# Altium PCB New_Bottom_Board.PcbDoc (part 2 of 2)
Units mm, origin at the board's own origin, x right, y up, seen from the top; angles counter-clockwise.
Board outline 85 x 66 mm, 2 copper layers (Top Layer, Bottom Layer); 47 components, 65 nets, 232 pads, 144 vias.
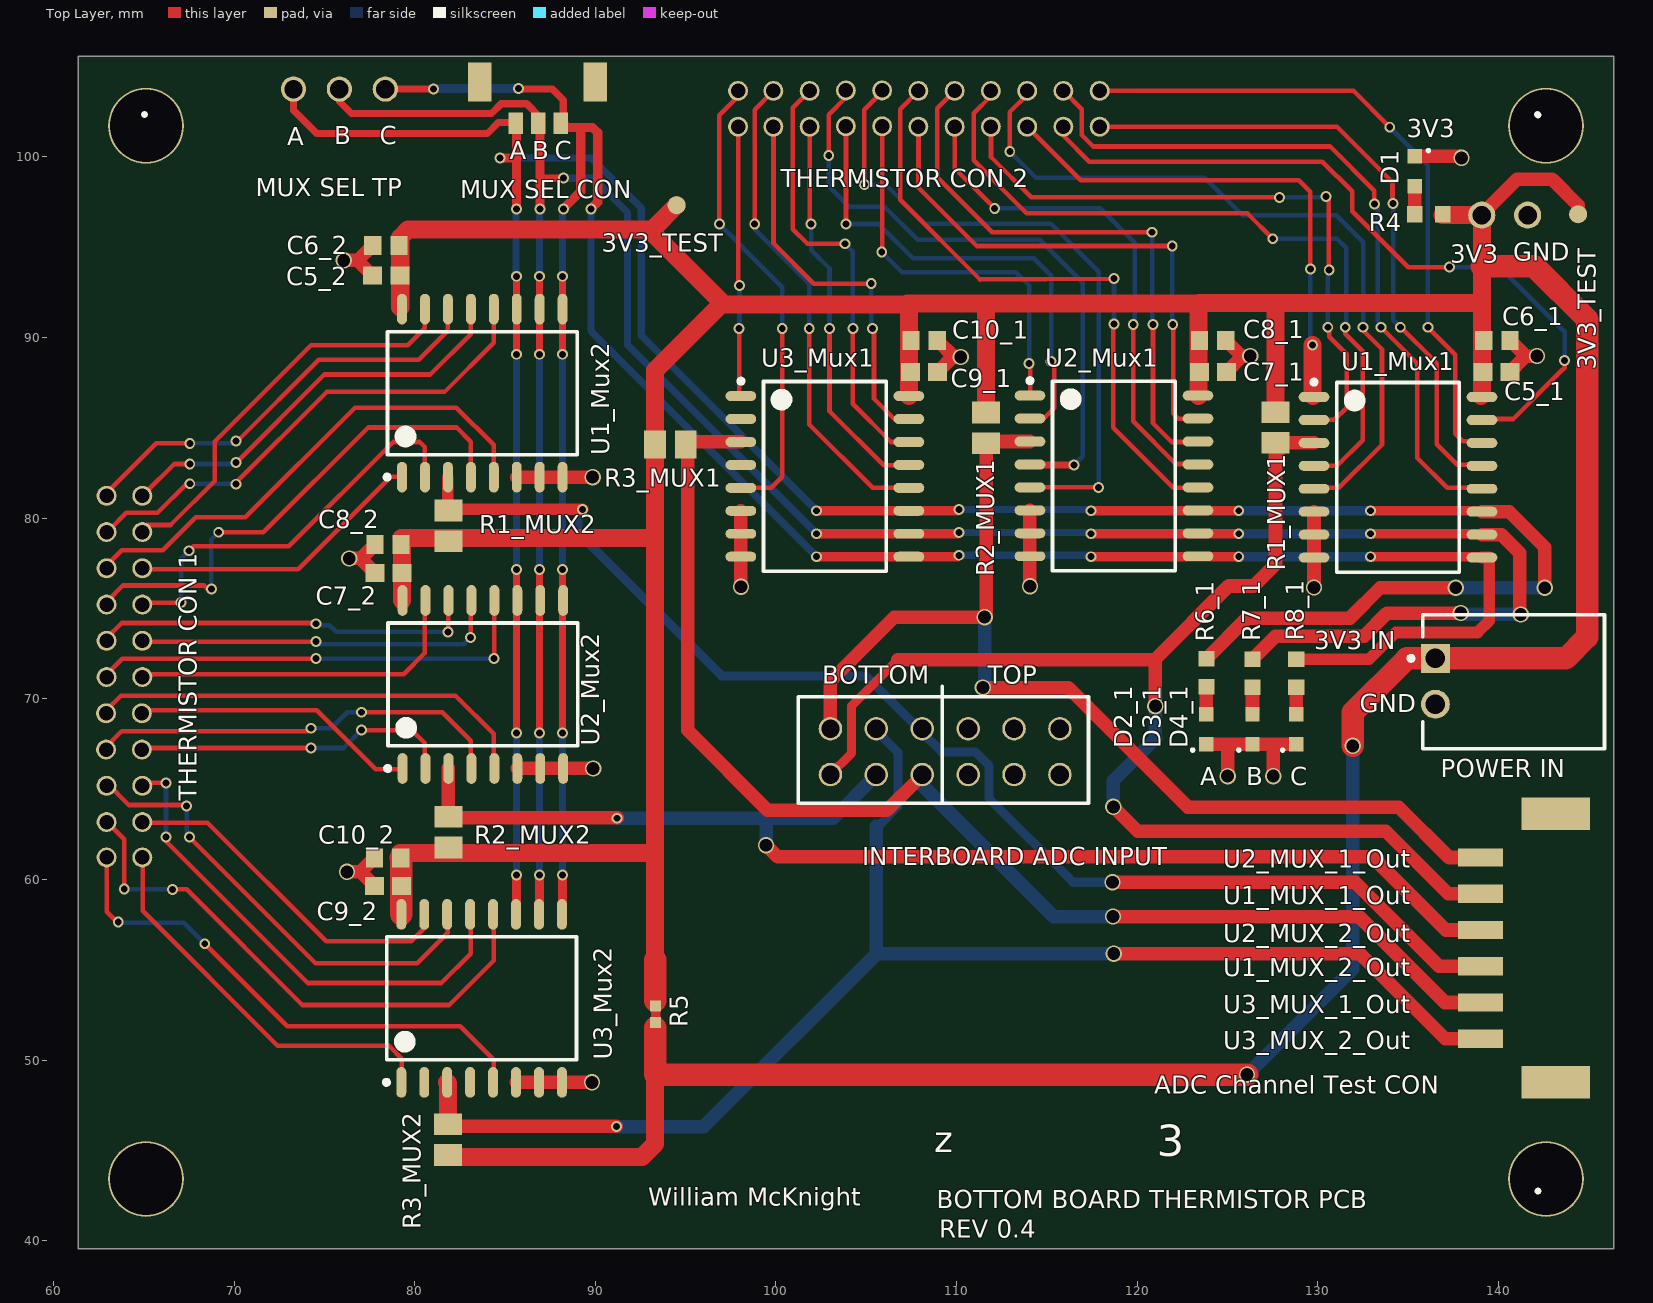
[diagram p0: Top Layer view]

## Via types
v1: diameter 0.6, hole 0.381, Top Layer to Bottom Layer, tented top, 115 vias
v2: diameter 0.9, hole 0.711, Top Layer to Bottom Layer, tented top, 29 vias

## Nets (pads, with @x,y where several pads share a name; then routed paths per layer and width w, separated by ;. In a path a pad name is that pad's centre, name@x,y a point inside that pad or via, vN(x,y) a via of type N, cw(c..) or ccw(c..) an arc to the next point about the centre after c; other vN are vias at no path point) (continued)
TS_IN9_2: (continued)
  Bottom Layer w0.254: v1(74.538,73.173) 74.686,73.025 82.721,73.025 v1(83.098,73.401)
TS_IN10_1: "THERMISTOR CON 2.10" U2_Mux1.14 | length 31.9
  Top Layer w0.254: 109.895,103.653 108.93,102.688 108.93,98.878 111.978,95.83 v1(120.817,95.83) ; v1(120.868,90.724) 120.868,85.263 121.909,84.222 U2_Mux1.14@123.384,84.222
  Bottom Layer w0.254: v1(120.817,95.83) 120.817,90.775 v1(120.868,90.724)
TS_IN10_2: "THERMISTOR CON 1.10" U2_Mux2.14 | length 21
  Top Layer w0.254: 62.956,73.376 63.78,74.2 v1@74.477,74.2 ; U2_Mux2.14@81.828,75.435 81.853,75.41 v1(81.853,73.706)
  Bottom Layer w0.254: v1@74.64,74.087 75.275,74.087 75.656,73.706 v1(81.853,73.706)
  other v1: 74.538,74.162
TS_IN11_1: "THERMISTOR CON 2.11" U2_Mux1.15 | length 29.6
  Top Layer w0.254: 107.888,101.672 107.888,98.293 111.114,95.068 v1(121.934,95.068) ; v1@121.96,90.699 121.985,90.673 121.985,85.797 122.265,85.517 U2_Mux1.15 U2_Mux1.15@123.384,85.492
  Bottom Layer w0.254: v1(121.934,95.068) 121.934,90.724 v1@121.96,90.699
  other v1: 121.96,90.724
TS_IN11_2: "THERMISTOR CON 1.11" U2_Mux2.15 | length 19
  Top Layer w0.254: 64.937,71.369 79.389,71.369 80.558,72.538 U2_Mux2.15@80.558,75.435
TS_IN12_1: "THERMISTOR CON 2.12" U2_Mux1.12 | length 34.5
  Top Layer w0.254: 107.888,103.653 106.875,102.64 106.875,97.63 111.292,93.213 v1(118.709,93.264) ; v1@118.658,90.75 118.658,85.009 121.985,81.682 U2_Mux1.12@123.384,81.682
  Bottom Layer w0.254: v1@118.709,90.724 v1(118.709,90.75) v1(118.709,93.264)
TS_IN12_2: "THERMISTOR CON 1.12" U2_Mux2.12 | length 25
  Top Layer w0.254: 62.956,71.369 63.819,72.233 v1(74.538,72.233) ; U2_Mux2.12@84.368,75.435 84.393,75.41 v1(84.393,72.233)
  Bottom Layer w0.254: v1(74.538,72.233) v1(84.393,72.233)
TS_IN13_1: "THERMISTOR CON 2.13" U2_Mux1.1 | length 22.1
  Top Layer w0.254: v1@105.882,94.737 105.882,101.697 ; U2_Mux1.1@114.084,86.762 v1@114.084,88.491
  Top Layer w0.4: v1(114.01,88.565) v1@114.084,88.491
  Bottom Layer w0.254: v1(105.856,94.737) 106.974,93.62 113.273,93.62 114.01,92.883 v1(114.01,88.565)
  Bottom Layer w0.508: v1(114.01,88.565) v1@114.06,88.514
TS_IN13_2: "THERMISTOR CON 1.13" U2_Mux2.1 | length 15.7
  Top Layer w0.254: 64.911,69.363 74.589,69.363 77.84,66.112 79.264,66.112 U2_Mux2.1@79.288,66.135
TS_IN14_1: "THERMISTOR CON 2.14" U2_Mux1.5 | length 36.3
  Top Layer w0.254: v1(104.891,98.471) 104.891,102.611 105.882,103.602 105.882,103.678 ; U2_Mux1.5 v1(117.845,81.707)
  Bottom Layer w0.254: v1(104.891,98.471) 106.059,98.471 108.218,96.312 115.203,96.312 117.87,93.645 v1@117.87,81.733
  Bottom Layer w0.508: v1(117.845,81.707) v1@117.87,81.733
TS_IN14_2: "THERMISTOR CON 1.14" U2_Mux2.5 | length 24.6
  Top Layer w0.254: 62.93,69.363 63.742,70.175 82.26,70.175 84.368,68.067 U2_Mux2.5@84.368,66.135
TS_IN15_1: "THERMISTOR CON 2.15" U2_Mux1.2 | length 26.9
  Top Layer w0.254: v1(103.875,96.287) 103.875,96.592 103.875,101.697 ; U2_Mux1.2@114.084,85.492 114.797,85.492 115.407,86.101 115.407,88.489 v1(115.229,88.667)
  Bottom Layer w0.254: v1(103.875,96.287) 105.678,96.287 105.882,96.084 107.583,94.382 114.264,94.382 115.229,93.417 v1(115.229,88.667)
TS_IN15_2: "THERMISTOR CON 1.15" U2_Mux2.2 | length 17.8
  Top Layer w0.254: 64.911,67.356 64.988,67.28 v1@74.132,67.28 ; v1(77.053,68.271) 79.847,68.271 80.558,67.559 U2_Mux2.2@80.558,66.135
  Bottom Layer w0.254: v1@74.132,67.28 v1(74.259,67.28) 76.062,67.28 v1(77.053,68.271)
TS_IN16_1: "THERMISTOR CON 2.16" U2_Mux1.4 | length 34.7
  Top Layer w0.254: v1@102.91,100.097 102.91,102.332 103.875,103.297 103.875,103.678
  Top Layer w0.4: U2_Mux1.4@114.084,82.952 v1(116.499,82.952)
  Bottom Layer w0.254: v1(102.922,100.084) 102.922,98.382 103.392,97.912 104.053,97.252 106.009,97.252 107.837,95.423 114.594,95.423 116.981,93.036 116.981,83.434 v1(116.499,82.952)
TS_IN16_2: "THERMISTOR CON 1.16" U2_Mux2.4 | length 23.2
  Top Layer w0.254: 62.93,67.356 63.774,68.2 74.086,68.2 v1(74.259,68.372) ; v1(77.053,69.261) 81.523,69.261 83.098,67.686 U2_Mux2.4@83.098,66.135
  Bottom Layer w0.254: v1(74.259,68.372) 75.376,68.372 76.265,69.261 v1(77.053,69.261)
TS_IN17_1: "THERMISTOR CON 2.17" U3_Mux1.13 | length 21.8
  Top Layer w0.254: 101.868,101.672 101.868,96.287 v1@101.945,96.211 ; v1@102.961,90.546 102.961,85.924 105.958,82.926 U3_Mux1.13@107.331,82.926
  Bottom Layer w0.254: v1@101.945,96.211 101.945,94.839 102.961,93.823 v1@102.961,90.546
  other v1: 102.961,90.496 101.945,96.287
TS_IN17_2: "THERMISTOR CON 1.17" U3_Mux2.13 | length 27.5
  Top Layer w0.254: 64.937,65.35 v1(66.232,65.35) ; v1@66.181,62.352 66.207,62.327 66.207,62.149 74.081,54.275 81.472,54.275 83.098,55.901 U3_Mux2.13@83.098,58.087
  Bottom Layer w0.254: v1(66.232,62.352) v1(66.232,65.35)
TS_IN18_1: "THERMISTOR CON 2.18" U3_Mux1.14 | length 24.3
  Top Layer w0.254: 101.868,103.653 100.929,102.713 100.929,96.007 101.741,95.195 v1(103.824,95.195) ; v1@104.256,90.546 104.256,86.33 106.364,84.222 U3_Mux1.14
  Bottom Layer w0.254: v1(103.824,95.195) 104.256,94.763 v1@104.256,90.546
  other v1: 104.256,90.496
TS_IN18_2: "THERMISTOR CON 1.18" U3_Mux2.14 | length 25.7
  Top Layer w0.254: 62.956,65.35 64.18,64.125 67.395,64.125 67.375,64.105 v1(67.375,64.075) ; v1(67.528,62.352) 74.513,55.367 80.142,55.367 81.828,57.053 U3_Mux2.14@81.828,58.087
  Bottom Layer w0.254: v1(67.375,64.075) 67.375,62.657 67.553,62.479 67.528,62.454 v1(67.528,62.352)
TS_IN19_1: "THERMISTOR CON 2.19" U3_Mux1.15 | length 21.6
  Top Layer w0.254: 99.862,101.675 99.862,95.212 102.089,92.985 v1(105.272,92.985) ; v1@105.348,90.47 105.424,90.394 105.424,86.609 106.542,85.492 U3_Mux1.15
  Bottom Layer w0.254: v1(105.272,92.985) 105.272,90.546 v1@105.348,90.47
  other v1: 105.348,90.496
TS_IN19_2: "THERMISTOR CON 1.19" U3_Mux2.15 | length 19.5
  Top Layer w0.254: 64.937,63.343 65.13,63.15 68.533,63.15 75.097,56.587 79.805,56.587 80.53,57.312 U3_Mux2.15
TS_IN20_1: "THERMISTOR CON 2.20" U3_Mux1.12 | length 27.1
  Top Layer w0.254: v1(98.82,96.287) 98.831,96.297 98.831,102.622 99.862,103.653 ; v1(101.843,90.496) 101.843,85.187 105.348,81.682 U3_Mux1.12
  Bottom Layer w0.254: v1(98.82,96.287) 98.82,96.007 101.843,92.985 v1(101.843,90.496)
TS_IN20_2: "THERMISTOR CON 1.20" U3_Mux2.12 | length 31
  Top Layer w0.254: 62.956,63.343 62.956,63.191 63.921,62.225 v1(63.921,59.482) ; v1(66.588,59.457) 67.375,59.457 73.776,53.056 81.904,53.056 84.368,55.52 U3_Mux2.12@84.368,58.087
  Bottom Layer w0.254: v1(63.921,59.482) 63.946,59.457 v1(66.588,59.457)
TS_IN21_1: "THERMISTOR CON 2.21" U3_Mux1.1 | length 14.7
  Top Layer w0.254: 97.906,101.672 97.906,92.959 v1(97.982,92.883) ; U3_Mux1.1@97.957,86.762 v1@97.957,90.242
  Bottom Layer w0.254: v1(97.957,90.496) 97.982,90.521 v1(97.982,92.883)
TS_IN21_2: "THERMISTOR CON 1.21" U3_Mux2.1 | length 22.2
  Top Layer w0.254: 64.937,61.387 64.937,58.263 72.404,50.795 78.577,50.795 79.288,50.084 U3_Mux2.1@79.288,48.787
TS_IN22_1: "THERMISTOR CON 2.22" U3_Mux1.5 | length 25.8
  Top Layer w0.254: v1(96.865,96.287) 96.865,102.307 97.906,103.348 97.906,103.653 ; U3_Mux1.5 99.735,81.682 100.344,82.291 v1(100.344,90.496)
  Bottom Layer w0.254: v1(96.865,96.287) 98.185,94.966 98.16,94.966 100.344,92.782 v1(100.344,90.496)
TS_IN22_2: "THERMISTOR CON 1.22" U3_Mux2.5 | length 29.1
  Top Layer w0.254: 62.956,61.387 62.956,58.212 63.514,57.653 v1(63.591,57.653) ; v1(68.378,56.447) 72.938,51.888 82.514,51.888 84.368,50.033 U3_Mux2.5@84.368,48.787
  Bottom Layer w0.254: v1@63.654,57.603 67.223,57.603 v1(68.378,56.447)
pads on no net: "ADC Channel Test CON.7" "ADC Channel Test CON.8" "INTERBOARD ADC INPUT.7" "INTERBOARD ADC INPUT.8" "INTERBOARD ADC INPUT.9" "INTERBOARD ADC INPUT.10" "INTERBOARD ADC INPUT.11" "INTERBOARD ADC INPUT.12" "MUX SEL CON.1" "MUX SEL CON.3" "MUX SEL CON.4" "MUX SEL CON.5" U3_Mux1.2 U3_Mux1.4 U3_Mux2.2 U3_Mux2.4

## Polygon pours and split planes (outlines as drawn)
no net on Top Layer "NONET_L01_P000" (solid, remove dead copper, pour order 0): 61.4,39.575
no net on Top Layer "NONET_L01_P002" (solid, remove dead copper, pour order 2): 61.375,105.525
AGND on Bottom Layer "AGND_L02_P006" (solid, remove dead copper, pour order 6): 61.375,39.575 146.375,39.575 146.375,105.575 61.375,105.575
AGND on Bottom Layer "AGND_L02_P008" (solid, remove dead copper, pour order 8): 61.375,105.525
AGND on Bottom Layer "AGND_L02_P010" (solid, remove dead copper, pour order 10): 61.375,105.525

## Other copper
Bottom Layer:
  pour cut-out: 89.881,98.825 89.753,98.697 89.753,97.125 91.5,97.125 90,98.625 89.75,98.625
  pour cut-out: 125.617,80.412 132.907,80.412 132.907,77.872 125.617,77.872
  pour cut-out: 110.123,80.488 110.2,80.412 117.439,80.412 117.439,77.872 117.362,77.948 110.123,77.948
  pour cut-out: 85.638,97.125 88.229,97.125 88.229,93.442 88.178,93.391 88.094,93.475 85.656,93.475 85.656,96.955 85.612,96.998
  pour cut-out: 85.638,89.073 88.178,89.073 88.178,77.161 85.638,77.161
  pour cut-out: 85.638,68.118 88.178,68.118 88.178,60.244 85.638,60.244

## Silkscreen, mask and mechanical layers (free items; w line width, h text height)
Top Overlay:
  lines w0.2: 109.2,64.525 109.2,64.225 ; 109.2,69.55 109.2,70.125 ; 109.2,70.7 109.2,70.125 ; 109.2,64.225 109.2,70.125 ; 109.2,64.225 117.3,64.225 117.3,70.125 109.2,70.125 ; 109.2,64.225 101.225,64.225 101.225,70.125 109.2,70.125
  lines w0.381: 65.038,102.338 65.05,102.35 ; 142.15,102.35 142.175,102.325 ; 142.169,42.744 142.175,42.75
  text "B" at 75.55,100.7 h1
  text "C" at 78.075,100.7 h1
  text "A" at 72.95,100.65 h1
  text "A" at 85.25,99.875 h1
  text "B" at 86.517,99.875 h1
  text "C" at 87.75,99.875 h1
  text "GND" at 140.8,94.25 h1
  text "3V3" at 137.325,94.15 h1
  text "3V3 IN" at 129.8,72.75 h1
  text "BOTTOM" at 102.55,70.85 h1
  text "TOP" at 111.725,70.85 h1
  text "GND" at 132.325,69.25 h1
  text "A" at 123.492,65.225 h1
  text "B" at 126.042,65.225 h1
  text "C" at 128.467,65.225 h1
  text "U2_MUX_1_Out" at 124.75,60.656 h1
  text "U1_MUX_1_Out" at 124.75,58.619 h1
  text "U2_MUX_2_Out" at 124.75,56.531 h1
  text "U1_MUX_2_Out" at 124.75,54.647 h1
  text "U3_MUX_1_Out" at 124.75,52.61 h1
  text "U3_MUX_2_Out" at 124.75,50.598 h1
  text "z" at 108.758,44.406 h2.5
  text "3" at 121.075,44.1 h3
  text "William McKnight" at 92.925,41.95 h1
  text "BOTTOM BOARD THERMISTOR PCB" at 108.9,41.8 h1
  text "REV 0.4" at 109.05,40.175 h1
Bottom Overlay:
  lines w0.2: 109.206,64.225 117.306,64.225 117.306,70.125 109.206,70.125 ; 109.206,64.225 109.206,70.125 ; 109.206,64.225 101.231,64.225 101.231,70.125 109.206,70.125
  text "THERMISTOR CON 2" at 136.775,102.8 h1
  text "B" at 76.2,100.7 h1
  text "C" at 78.75,100.7 h1
  text "A" at 73.625,100.65 h1
  text "22" at 98.566,99.35 h0.8
  text "20" at 100.522,99.35 h0.8
  text "18" at 102.462,99.35 h0.8
  text "16" at 104.469,99.35 h0.8
  text "14" at 106.475,99.35 h0.8
  text "12" at 108.482,99.35 h0.8
  text "10" at 110.489,99.35 h0.8
  text "8" at 112.162,99.35 h0.8
  text "6" at 114.235,99.35 h0.8
  text "4" at 116.242,99.35 h0.8
  text "2" at 118.225,99.35 h0.8
  text "THERMISTOR CON 1" at 63.5,99 h1 r90
  text "21" at 98.433,97.375 h0.8
  text "19" at 100.456,97.375 h0.8
  text "17" at 102.462,97.375 h0.8
  text "15" at 104.469,97.375 h0.8
  text "13" at 106.475,97.375 h0.8
  text "11" at 108.349,97.375 h0.8
  text "9" at 110.155,97.375 h0.8
  text "7" at 112.162,97.375 h0.8
  text "5" at 114.235,97.375 h0.8
  text "3" at 116.242,97.375 h0.8
  text "1" at 118.025,97.375 h0.8
  text "MUX SELECT TEST POINTS" at 80.65,96.6 h1
  text "POWER OUT" at 137.65,95.775 h1
  text "GND" at 143.45,94.25 h1
  text "3V3" at 140,94.2 h1
  text "2" at 67.525,81.45 h0.8 r90
  text "1" at 69.5,81.25 h0.8 r90
  text "4" at 67.525,79.467 h0.8 r90
  text "3" at 69.5,79.467 h0.8 r90
  text "6" at 67.525,77.46 h0.8 r90
  text "5" at 69.5,77.46 h0.8 r90
  text "8" at 67.525,75.387 h0.8 r90
  text "7" at 69.5,75.387 h0.8 r90
  text "10" at 67.525,73.714 h0.8 r90
  text "9" at 69.5,73.38 h0.8 r90
  text "3V3 IN" at 134.95,71.75 h1
  text "12" at 67.525,71.707 h0.8 r90
  text "11" at 69.5,71.574 h0.8 r90
  text "BOTTOM" at 108.3,70.825 h1
  text "TOP" at 114.4,70.825 h1
  text "14" at 67.525,69.7 h0.8 r90
  text "13" at 69.5,69.7 h0.8 r90
  text "GND" at 134.95,69.25 h1
  text "16" at 67.525,67.694 h0.8 r90
  text "15" at 69.5,67.694 h0.8 r90
  text "POWER IN" at 144.85,67.225 h1
  text "18" at 67.525,65.687 h0.8 r90
  text "17" at 69.5,65.687 h0.8 r90
  text "20" at 67.525,63.747 h0.8 r90
  text "19" at 69.5,63.681 h0.8 r90
  text "22" at 67.525,61.791 h0.8 r90
  text "21" at 69.5,61.658 h0.8 r90
  text "THERMISTOR ADC SIGNALS" at 114.7,60.775 h1
  text "3" at 137.1,40.975 h8
Board Outline:
  the board outline again, w0.1